# Altium PCB PCB_Right.pcbdoc
Units mil, origin at the board's own origin, x right, y up, seen from the top; angles counter-clockwise.
Board outline 7305 x 5435 mil, 2 copper layers (Top Layer, Bottom Layer), stack 62.206 mil thick; 24 components, 33 nets, 133 pads, 32 vias.
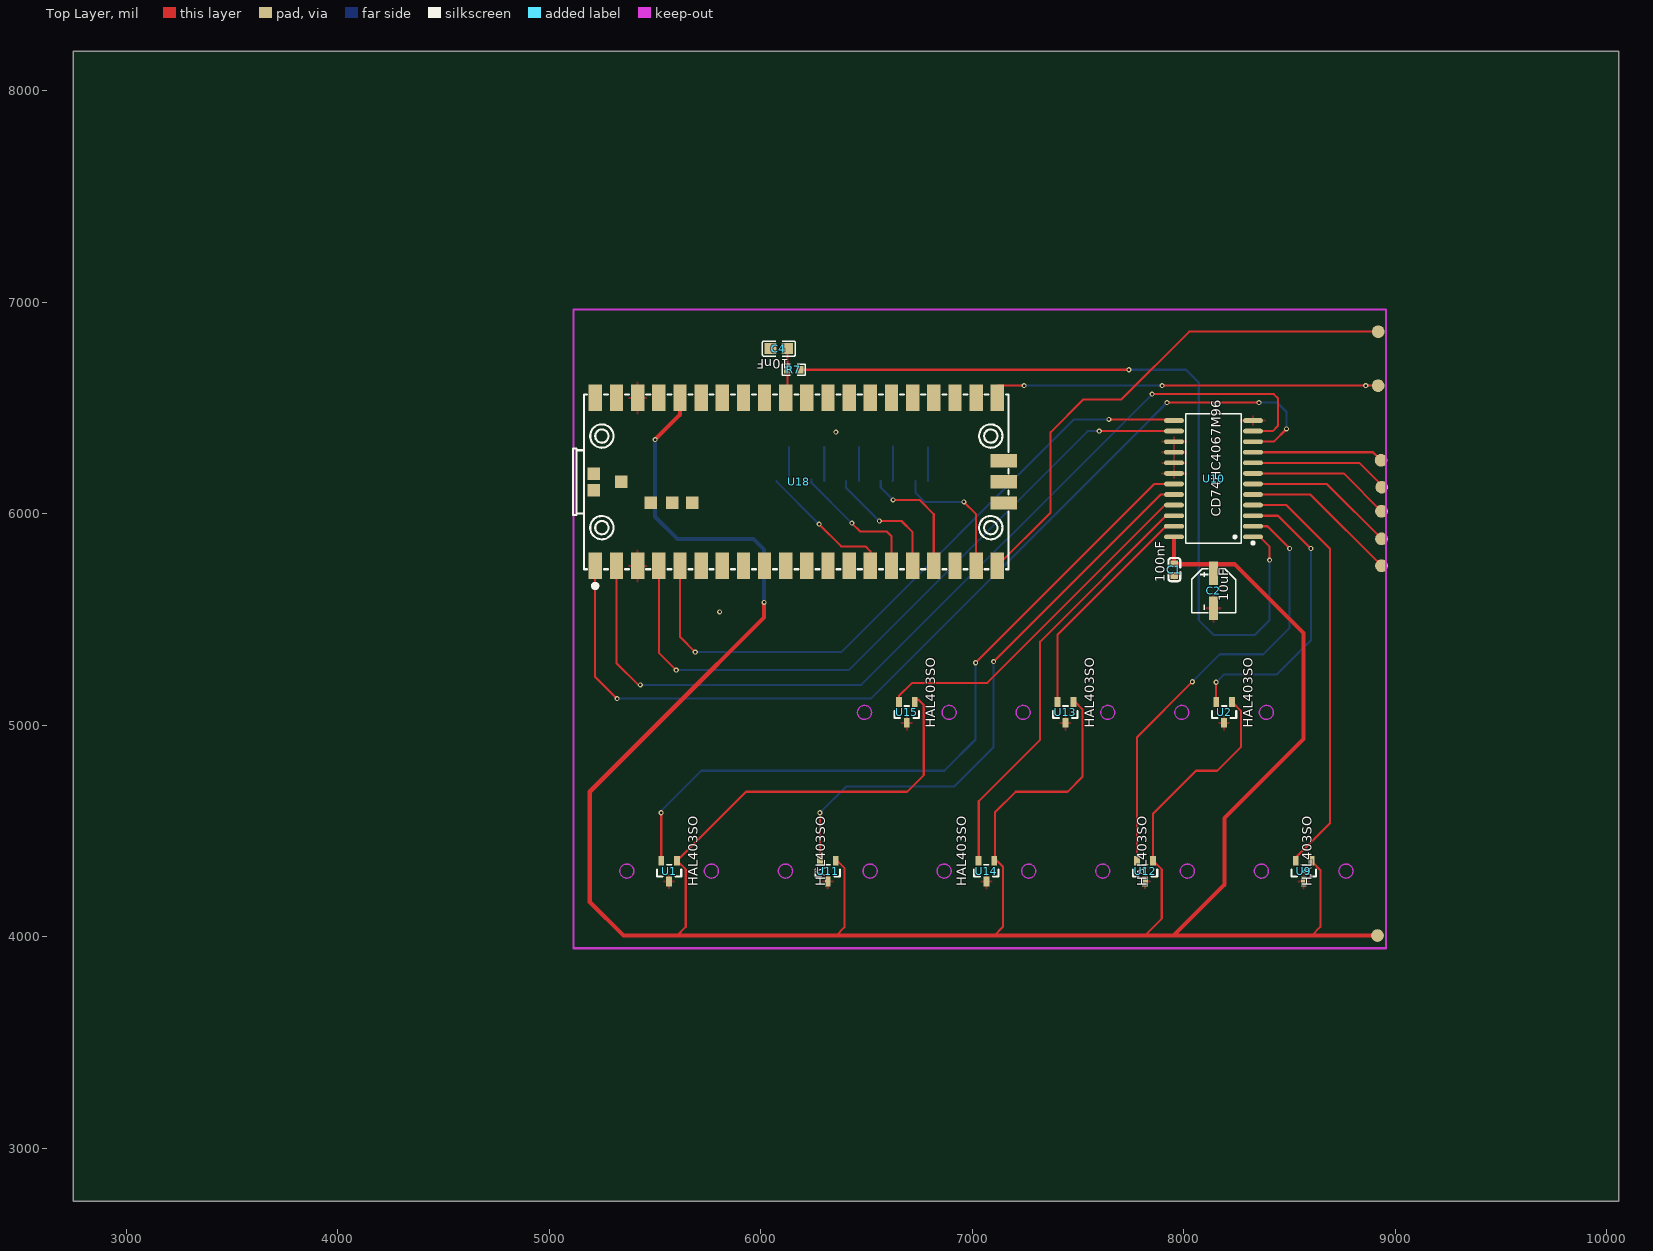
[diagram p0: Top Layer view]
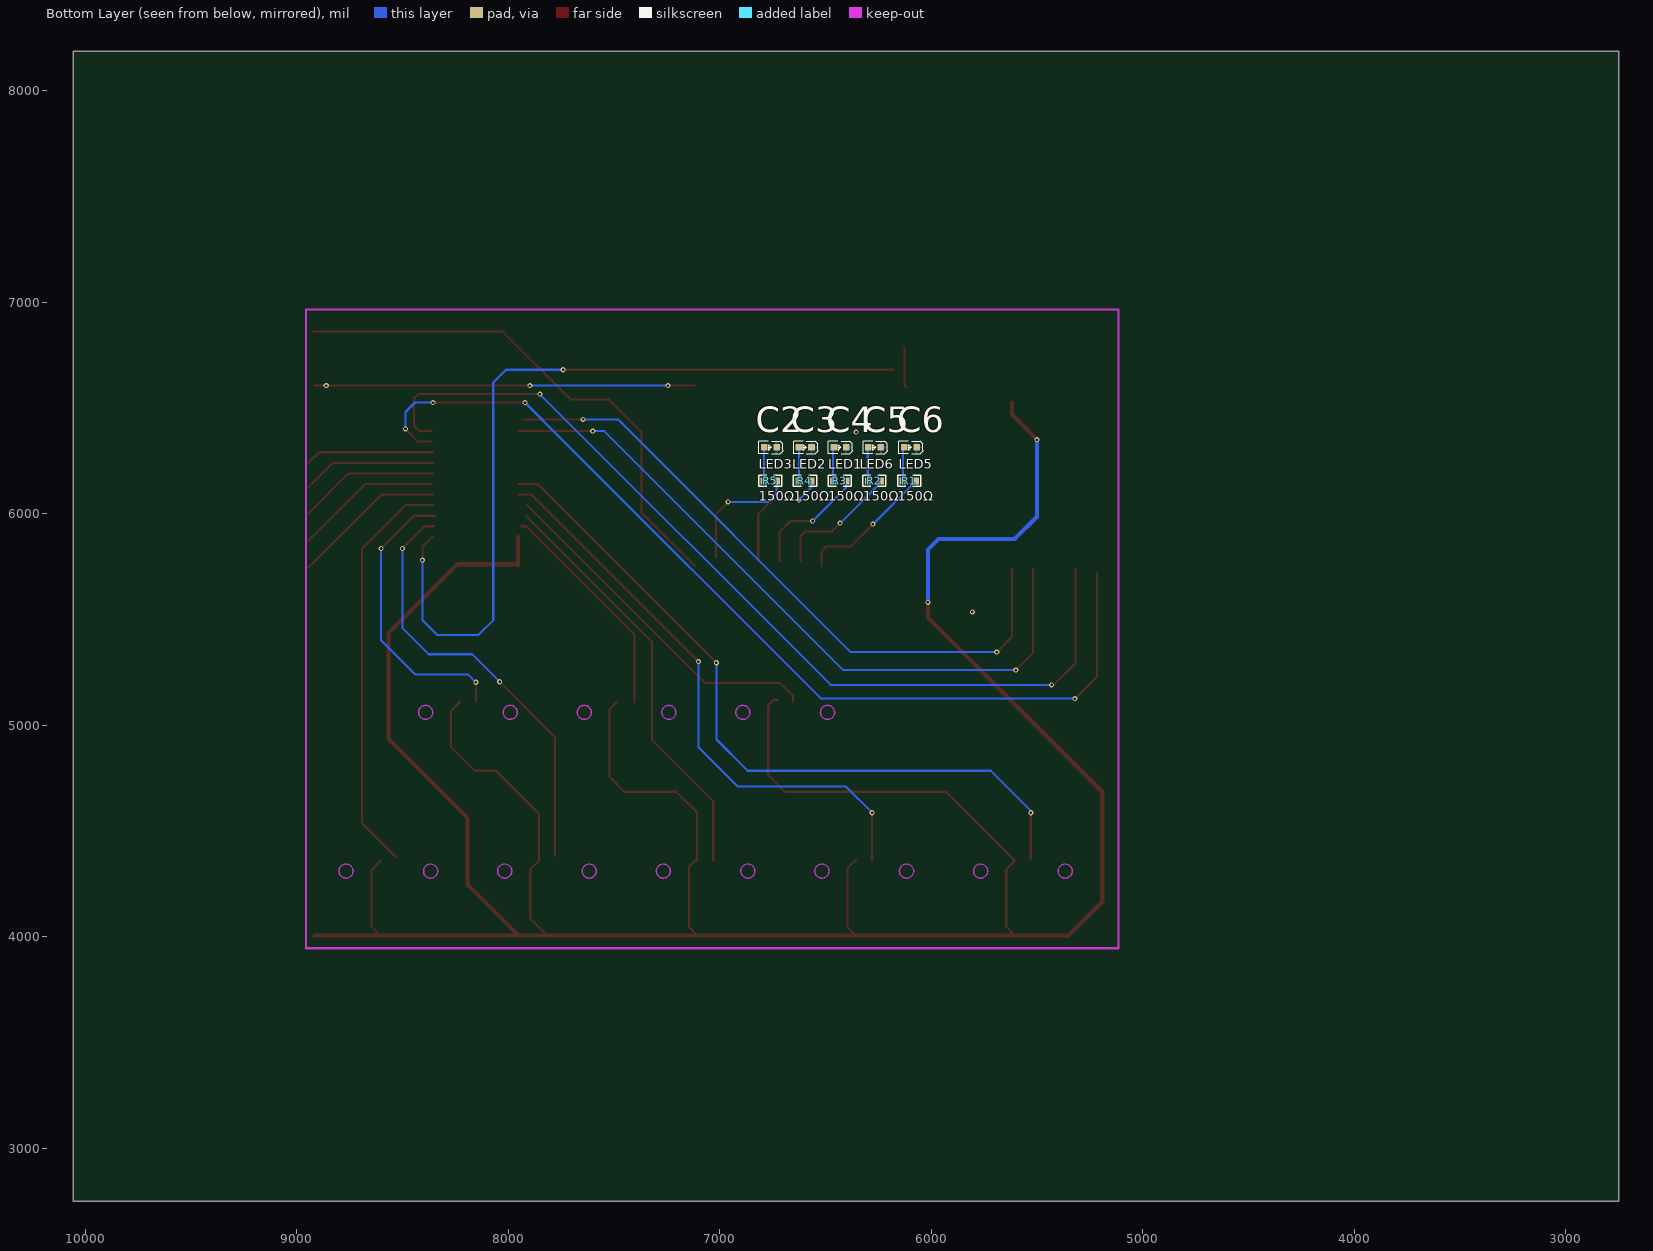
[diagram p1: Bottom Layer view, seen from below]

## Layer stack, top to bottom
Top Solder Mask Layer: solder mask 0.394, Dk 3.3
Top Layer: signal copper 1.379
Dielectric1: surface 59.449, FR4, Dk 4.5
Bottom Layer: signal copper 1.378
Bottom Solder Mask Layer: solder mask 0.394, Dk 3.3

## Board outline
10055,2750 2750,2750 2750,8185 10055,8185

## Design rules (kind name [scope] priority, off if disabled: settings)
BoardOutlineClearance copperThickness1oz [All] p0: genericclearance=10 ignorepadtopadclearanceinfootprint=FALSE except(0: Arc-SplitContinuation Track-SplitContinuation SMDPad-SplitContinuation THPad-SplitContinuation Via-SplitContinuation Fill-SplitContinuation Poly-SplitContinuation Region-SplitContinuation Text-SplitContinuation)
BoardOutlineClearance copperThickness2oz [All] p0: genericclearance=10 ignorepadtopadclearanceinfootprint=FALSE except(0: Arc-SplitContinuation Track-SplitContinuation SMDPad-SplitContinuation THPad-SplitContinuation Via-SplitContinuation Fill-SplitContinuation Poly-SplitContinuation Region-SplitContinuation Text-SplitContinuation)
BoardOutlineClearance otherClearance [All] p0: genericclearance=10 ignorepadtopadclearanceinfootprint=FALSE except(0: Arc-SplitContinuation Track-SplitContinuation SMDPad-SplitContinuation THPad-SplitContinuation Via-SplitContinuation Fill-SplitContinuation Poly-SplitContinuation Region-SplitContinuation Text-SplitContinuation)
Clearance copperThickness1oz [All] p1: gap=7 ignorepadtopadclearanceinfootprint=FALSE
Clearance copperThickness2oz [All] p1: gap=7 ignorepadtopadclearanceinfootprint=FALSE
Clearance otherClearance [All] p1: gap=7 ignorepadtopadclearanceinfootprint=FALSE
DiffPairsRouting differentialPair [All] p1: maxuncoupledlength=10 minlimit=6 maxlimit=Infinity mostfreqgap=6 toplayer_minwidth=5 toplayer_prefwidth=10 toplayer_maxwidth=100 bottomlayer_minwidth=5 bottomlayer_prefwidth=10 bottomlayer_maxwidth=100
PasteMaskExpansion pasteMaskExpansion [All] p1: expansion=0
PlaneConnect innerPlane [All] p1: planeconnectstyle=Relief reliefexpansion=20 reliefentries=4 reliefconductorwidth=10 reliefairgap=10
PolygonConnect copperRegion [All] p1: connectstyle=Relief reliefentries=4 reliefconductorwidth=10 polygonreliefangle="90 Angle" airgapwidth=10
RoutingVias viaSize [All] p1: viastyle="Through Hole" holewidth=12.0078 minholewidth=11.811 maxholewidth=248.0314 width=12.0078 minwidth=11.811 maxwidth=248.0314
SolderMaskExpansion solderMaskExpansion [All] p1: useseparateexpansions=TRUE expansion=2 expansionbottom=2
Width copperThickness1oz [All] p1: maxlimit=100 minlimit=5 preferedwidth=10
Width copperThickness2oz [All] p1: maxlimit=100 minlimit=8 preferedwidth=10

## Components (designator, comment, footprint, x,y, rotation, side; value= is the part's Value field where it differs from the comment)
C1 "100nF" C0603 7955,5735 r90 top
C2 "10uF" CAP-SMD_BD5.0-L5.3-W5.3-LS6.0-FD 8140,5635 r270 top
C4 "10nF" C0805 6085,6780 r0 top
LED1 "" LED0603-RD 6431.28,6313.7 r0 bottom
LED2 "" LED0603-RD 6595.41,6313.7 r0 bottom
LED3 "" LED0603-RD 6759.53,6313.7 r0 bottom
LED5 "" LED0603-RD 6098.04,6313.7 r0 bottom
LED6 "" LED0603-RD 6267.16,6313.7 r0 bottom
R1 "150Ω" R0603 6104.03,6154.71 r0 bottom
R2 "150Ω" R0603 6268.15,6154.71 r0 bottom
R3 "150Ω" R0603 6432.27,6154.71 r0 bottom
R4 "150Ω" R0603 6596.39,6154.71 r0 bottom
R5 "150Ω" R0603 6760.51,6154.71 r0 bottom
R7 "" R0603 6155,6680 r180 top
U1 "HAL403SO" SOT-23-3_L2.9-W1.3-P1.90-LS2.4-BR-CW 5566.26,4310 r90 top
U2 "HAL403SO" SOT-23-3_L2.9-W1.3-P1.90-LS2.4-BR-CW 8190,5060 r90 top
U9 "HAL403SO" SOT-23-3_L2.9-W1.3-P1.90-LS2.4-BR-CW 8566.26,4310 r90 top
U10 "CD74HC4067M96" SOIC-24_L15.4-W7.5-P1.27-LS10.3-BL 8140,6165 r90 top
U11 "HAL403SO" SOT-23-3_L2.9-W1.3-P1.90-LS2.4-BR-CW 6316.26,4310 r90 top
U12 "HAL403SO" SOT-23-3_L2.9-W1.3-P1.90-LS2.4-BR-CW 7816.26,4310 r90 top
U13 "HAL403SO" SOT-23-3_L2.9-W1.3-P1.90-LS2.4-BR-CW 7440,5060 r90 top
U14 "HAL403SO" SOT-23-3_L2.9-W1.3-P1.90-LS2.4-BR-CW 7066.26,4310 r90 top
U15 "HAL403SO" SOT-23-3_L2.9-W1.3-P1.90-LS2.4-BR-CW 6690,5060 r90 top
U18 "" COMM-SMD_L51.0-W21.0-P2.54_SC0916 6180,6150 r0 top

## Footprints (in the part's own frame and the unit in brackets; to place one, negate y for a bottom-side part, rotate by r counter-clockwise, add the part's x,y. Pads: shape width x height; smd on the part's side, far side on the other; paste and mask are expansions set on the pad)
C0603 [mm]
  rect 0.8x0.9 smd: 1(-0.7,0) 2(0.7,0)
  silkscreen extent -1.39,-0.71 1.39,0.71
C0805 [mm]
  rect 1.41x1.35 smd: 1(-1,0) 2(1,0)
  silkscreen extent -1.96,-0.9 1.96,0.9
CAP-SMD_BD5.0-L5.3-W5.3-LS6.0-FD [mm]
  rect 2.8x1.1 smd: 1(-2.1,0) 2(2.1,0)
  silkscreen extent -2.66,-2.62 2.66,2.65
COMM-SMD_L51.0-W21.0-P2.54_SC0916 [mm]
  rect 1.6x3.2 smd: 1(-24.445,-10.087) 2(-21.905,-10.087) 3(-19.365,-10.087) 4(-16.825,-10.087) 5(-14.285,-10.087) 6(-11.745,-10.087) 7(-9.205,-10.087) 8(-6.665,-10.087) 9(-4.125,-10.087) 10(-1.585,-10.087) 11(0.955,-10.087) 12(3.495,-10.087) 13(6.035,-10.087) 14(8.575,-10.087) 15(11.115,-10.087) 16(13.655,-10.087) 17(16.195,-10.087) 18(18.735,-10.087) 19(21.275,-10.087) 20(23.815,-10.087) 21(23.815,10.087) 22(21.275,10.087) 23(18.735,10.087) 24(16.195,10.087) 25(13.655,10.087) 26(11.115,10.087) 27(8.575,10.087) 28(6.035,10.087) 29(3.495,10.087) 30(0.955,10.087) 31(-1.585,10.087) 32(-4.125,10.087) 33(-6.665,10.087) 34(-9.205,10.087) 35(-11.745,10.087) 36(-14.285,10.087) 37(-16.825,10.087) 38(-19.365,10.087) 39(-21.905,10.087) 40(-24.445,10.087)
  rect 3.2x1.6 smd: 41(24.615,-2.54) 42(24.615,0) 43(24.615,2.54)
  rect 1.5x1.5 smd: TP1(-21.315,0) TP2(-24.615,1) TP3(-24.615,-1) TP4(-17.815,-2.5) TP5(-15.188,-2.5) TP6(-12.815,-2.5)
  silkscreen extent -27.11,-12.75 25.18,10.5
LED0603-RD [mm]
  rect 0.8x0.8 smd: 1(-0.749,0) 2(0.749,0)
  silkscreen extent -1.49,-0.75 1.39,0.76
R0603 [mil]
  rect 31.75x34.02 smd: 1(-29.66,0) 2(29.66,0)
  silkscreen extent -55,-26 55,26
SOIC-24_L15.4-W7.5-P1.27-LS10.3-BL [mil]
  oval 22.6x94.02 smd: 1(-275,-186.77) 2(-225,-186.77) 3(-175,-186.77) 4(-125,-186.77) 5(-75,-186.77) 6(-25,-186.77) 7(25,-186.77) 8(75,-186.77) 9(125,-186.77) 10(175,-186.77) 11(225,-186.77) 12(275,-186.77) 13(275,186.77) 14(225,186.77) 15(175,186.77) 16(125,186.77) 17(75,186.77) 18(25,186.77) 19(-25,186.77) 20(-75,186.77) 21(-125,186.77) 22(-175,186.77) 23(-225,186.77) 24(-275,186.77)
  silkscreen extent -310,-193 306,131
SOT-23-3_L2.9-W1.3-P1.90-LS2.4-BR-CW [mm]
  rect 1.15x0.7 smd: 1(1.25,-0.95) 2(-1.25,0) 3(1.25,0.95)
  silkscreen extent -0.65,-1.46 0.76,1.46

## Free pads (board coordinates)
  round 60 smd: 1(8932,6252) 2(8915.31,4005) 2(8918.25,6604.75) 2(8918.6,6860) 4(8935,6125) 5(8934.03,6010.97) 7(8934.15,5880.69) 9(8934.1,5753.42)

## Via types
v1: diameter 24.02, hole 12.01, Top Layer to Bottom Layer, 32 vias

## Nets (pads, with @x,y where several pads share a name; then routed paths per layer and width w, separated by ;. In a path a pad name is that pad's centre, name@x,y a point inside that pad or via, vN(x,y) a via of type N, cw(c..) or ccw(c..) an arc to the next point about the centre after c; other vN are vias at no path point)
3.3V: C1.2 C2.1 pad.2@8915.31,4005 U1.1 U2.1 U9.1 U10.24 U11.1 U12.1 U13.1 U14.1 U15.1 U18.36 | length 15978.5
  Top Layer w10: 5603.66,4005 5645,4046.34 5645,4317.86 U1.1 5929.46,4685 6691.26,4685 6770,4763.74 6770,5095 6745,5120 U15.1@6725,5120 ; U11.1 6360.8,4359.2 6395,4325 6395,4043.58 6356.42,4005 ; 7103.53,4005 7145,4046.47 7145,4330 7115,4360 U14.1@7105,4360 ; U14.1@7106.26,4365 7106.26,4586.66 7204.6,4685 7450,4685 7520,4755 7520,5075 U13.1@7485,5110 ; 7814.67,4005 7895,4085.33 7895,4317.86 U12.1 7853.66,4580.86 7957.8,4685 8057.21,4784.41 8157.23,4784.41 8270.77,4897.95 8270.77,5065.83 U2.1 ; U9.1 8603.66,4356.34 8645,4315 8645,4046.03 8603.97,4005
  Top Layer w19.68: v1(5500,6350) 5617.6,6467.6 U18.36@5617.6,6524.01 ; 5581.26,5075 6015,5508.74 v1(6015,5580) ; 7950.57,4005 8191.26,4245.69 8191.26,4560 8565,4933.74 8565,5435 8239.29,5760.71 7960.71,5760.71 7955,5755 7953.23,5756.77 U10.24
  Top Layer w19.7: v1(6015,5580) 6015,5508.74 5191.05,4684.79 5191.05,4163.95 5350,4005 pad.2@8915.31,4005
  Bottom Layer w19.68: v1(5500,6350) 5500,5985 5605,5880 5965,5880 6015,5830 v1(6015,5580)
$1N67: R7.1 U10.1 | length 3843.6
  Top Layer w10: R7.1@6180.59,6680 6274.2,6680 v1(7740,6680) ; U10.1@8358.5,5890 8405,5843.5 v1(8405,5780)
  Bottom Layer w10: v1(7740,6680) 8010,6680 8070,6620 8070,5496.5 8140.25,5426.25 8334.5,5426.25 8405,5496.75 v1(8405,5780)
$1N118: LED5.2 R1.2 | length 158.9
  Bottom Layer w10: R1.2 LED5.2@6133.69,6313.58
$1N119: R1.1 U18.14 | length 652.8
  Top Layer w10: v1(6275,5950) 6380,5845 6495,5845 6517.59,5822.41 U18.14
  Bottom Layer w10: R1.1 6074.37,6150.63 v1(6275,5950)
$1N120: LED6.2 R2.2 | length 158.8
  Bottom Layer w10: R2.2@6299.45,6154.71 LED6.2@6299.45,6313.49
$1N121: R2.1 U18.15 | length 615.3
  Top Layer w10: v1(6430,5955) 6470,5915 6595,5915 6617.6,5892.4 U18.15@6617.6,5775.98
  Bottom Layer w10: R2.1@6240,6160 6240,6148.99 6238.01,6146.99 v1(6430,5955)
$1N122: LED1.2 R3.2 | length 158.8
  Bottom Layer w10: R3.2@6463.57,6154.71 LED1.2@6463.57,6313.49
$1N123: R3.1 U18.16 | length 570.7
  Top Layer w10: v1(6560,5965) 6665,5965 6717.6,5912.4 U18.16@6717.6,5775.98
  Bottom Layer w10: R3.1 6402.61,6122.39 v1(6560,5965)
$1N124: LED2.2 R4.2 | length 162.4
  Bottom Layer w10: R4.2@6621.98,6154.71 6624.33,6157.05 LED2.2@6624.33,6316.12
$1N125: R4.1 U18.17 | length 555.9
  Top Layer w10: v1(6625,6065) 6750,6065 6817.6,5997.4 U18.17@6817.6,5775.98
  Bottom Layer w10: R4.1 6566.73,6123.27 v1(6625,6065)
$1N126: LED3.2 R5.2 | length 156.3
  Bottom Layer w10: R5.2 LED3.2@6790.17,6311.01
$1N127: R5.1 U18.19 | length 588.4
  Top Layer w10: v1(6960,6055) 7017.59,5997.41 U18.19@7017.59,5793.49
  Bottom Layer w10: R5.1 6730.85,6099.15 6775,6055 v1(6960,6055)
$1N130: pad.2@8918.6,6860 U18.20 | length 2482
  Top Layer w10: U18.20 7370,6005.27 7370,6385 7525,6540 7705,6540 8025,6860 pad.2@8918.6,6860
$1N131: pad.2@8918.25,6604.75 U18.21 | length 1799.8
  Top Layer w10: U18.21@7118.47,6604.75 v1(7245,6604.75) ; v1(7896.73,6604.75) v1(8859.75,6604.75) pad.2@8918.25,6604.75
  Bottom Layer w10: v1(7245,6604.75) v1(7896.73,6604.75)
A: U10.22 U14.3 | length 1997.9
  Top Layer w10: U14.3 7030,4360.34 7030,4640 7320,4930 7320,5100 7320,5394.94 U10.22@7915.06,5990
A#: U10.21 U15.3 | length 1659.8
  Top Layer w10: U15.3 6652.6,5137.6 6715,5200 7070.2,5200 7164.41,5294.21 U10.21@7910.2,6040
ADDRESS_A: U10.10 U18.1 | length 4658.7
  Top Layer w10: U18.1@5215,5720 5215,5230 v1(5320,5125) 5307.69,5137.31 ; v1(7920,6525) v1(8355,6525) ; U10.10@8360,6340 8425,6340 v1(8485,6400)
  Bottom Layer w10: v1@5329.44,5125 v1(5320,5125) 6520,5125 7747.24,6352.24 v1(7920,6525) ; v1(8355,6525) 8440,6525 8485,6480 v1(8485,6400)
ADDRESS_B: U10.11 U18.2 | length 4417.2
  Top Layer w10: U18.2@5317.6,5736.61 5317.6,5292.4 5420,5190 v1(5430,5190) ; v1(7850,6565) 7965,6565 8425,6565 8445,6545 8445,6415 8420,6390 U10.11@8360,6390
  Bottom Layer w10: v1(5430,5190) 5440,5190 6475,5190 v1(7850,6565)
ADDRESS_C: U10.14 U18.4 | length 3332
  Top Layer w10: U18.4@5517.59,5736.61 5517.59,5342.41 v1(5600,5260) ; v1(7599.81,6390) 7633.54,6390 7750,6390 U10.14
  Bottom Layer w10: v1(5600,5260) 5655,5260 6415,5260 7545,6390 v1(7599.81,6390)
ADDRESS_D: U10.13 U18.5 | length 3112.2
  Top Layer w10: U18.5@5617.6,5736.61 5617.6,5417.4 v1(5690,5345) ; v1(7645.35,6445) 7675,6445 7765,6445 U10.13@7925,6445
  Bottom Layer w10: v1(5690,5345) 6380,5345 7480,6445 v1(7645.35,6445)
B: U10.20 U11.3 | length 2761.2
  Top Layer w10: U11.3 v1(6278.86,4585.59) ; v1(7100,5300) 7890,6090 U10.20
  Bottom Layer w10: v1(6278.86,4585.59) 6403.27,4710 6795,4710 6915,4710 7100,4895 v1(7100,5300)
C: pad.1 U10.9 | length 609.7
  Top Layer w10: U10.9@8355,6290 8710.19,6290 8894,6290 pad.1@8944.02,6239.98
C#: pad.4 U10.8 | length 636.7
  Top Layer w10: U10.8@8355,6240 8685.88,6240 8828.86,6240 pad.4@8944.02,6124.85
C+1: U1.3 U10.19 | length 3494.7
  Top Layer w10: U1.3@5528.86,4367.43 v1(5528.86,4585.59) ; v1(7015,5295) 7860,6140 U10.19
  Bottom Layer w10: v1@5528.86,4595.72 5717.55,4784.41 6867.18,4784.41 7015,4932.23 v1(7015,5295)
COMMON: C4.2 R7.2 U18.31 | length 184.2
  Top Layer w10: U18.31@6117.6,6599.41 6125.34,6607.15 6125.34,6779.03 C4.2
D: pad.5 U10.7 | length 666
  Top Layer w10: U10.7@8355,6190 8654.61,6190 8755,6190 pad.5@8943.1,6001.9
D#: pad.7 U10.6 | length 695.5
  Top Layer w10: U10.6@8360,6140 8626.53,6140 8674.84,6140 pad.7@8944.02,5870.82
E: pad.9 U10.5 | length 732.5
  Top Layer w10: U10.5@8355,6090 8597.52,6090 pad.9@8944.02,5743.5
F: U9.3 U10.4 | length 1946.2
  Top Layer w10: U10.4@8355,6040 8485,6040 8690,5835 8690,4535 U9.3@8530,4375
F#: U2.3 U10.3 | length 1379
  Top Layer w10: U2.3 v1(8152.6,5202.6) ; U10.3@8342.76,5990 8445,5990 v1(8600,5835)
  Bottom Layer w10: v1(8152.6,5202.6) 8190,5240 8440,5240 8600,5400 v1(8600,5835)
G: U10.2 U12.3 | length 2065.1
  Top Layer w10: 7778.86,4382.17 7778.86,4943.86 v1(8040,5205) ; U10.2@8350,5940 8395,5940 v1(8500,5835)
  Bottom Layer w10: v1(8040,5205) 8170,5335 8375,5335 8500,5460 v1(8500,5835)
G#: U10.23 U13.3 | length 1065.3
  Top Layer w10: U13.3 7402.6,5427.6 7915,5940 U10.23@7937.24,5940
GND: C1.1 C2.2 LED1.1 LED2.1 LED3.1 LED5.1 LED6.1 U1.2 U2.2 U9.2 U10.12 U10.15 U10.16 U10.17 U10.18 U11.2 U12.2 U13.2 U14.2 U15.2 U18.3 U18.38
  other v1: 5805,5535 6355,6385
pads on no net: C4.1 U18.6 U18.7 U18.8 U18.9 U18.10 U18.11 U18.12 U18.13 U18.18 U18.22 U18.23 U18.24 U18.25 U18.26 U18.27 U18.28 U18.29 U18.30 U18.32 U18.33 U18.34 U18.35 U18.37 U18.39 U18.40 U18.41 U18.42 U18.43 U18.TP1 U18.TP2 U18.TP3 U18.TP4 U18.TP5 U18.TP6

## Polygon pours and split planes (outlines as drawn)
GND on Bottom Layer (solid, remove dead copper, pour order 2): 3000,7935 9805,7935 9805,3000 3000,3000
GND on Top Layer (solid, remove dead copper, pour order 0): 4900,6965 9255,6965 9255,3635 4900,3635

## Keep-outs
Board Outline Layer:
  region: 5399.72,4310 cw(c5366.26,4310) 5332.8,4310 cw(c5366.26,4310)
  circle w0.1: c5366.26,4310 r33.46
  region: 5399.72,4310 cw(c5366.26,4310) 5332.8,4310 cw(c5366.26,4310)
  region: 5799.72,4310 cw(c5766.26,4310) 5732.8,4310 cw(c5766.26,4310)
  circle w0.1: c5766.26,4310 r33.46
  region: 5799.72,4310 cw(c5766.26,4310) 5732.8,4310 cw(c5766.26,4310)
  region: 6149.72,4310 cw(c6116.26,4310) 6082.8,4310 cw(c6116.26,4310)
  circle w0.1: c6116.26,4310 r33.46
  region: 6149.72,4310 cw(c6116.26,4310) 6082.8,4310 cw(c6116.26,4310)
  region: 6523.46,5060 cw(c6490,5060) 6456.54,5060 cw(c6490,5060)
  circle w0.1: c6490,5060 r33.46
  region: 6523.46,5060 cw(c6490,5060) 6456.54,5060 cw(c6490,5060)
  region: 6549.72,4310 cw(c6516.26,4310) 6482.8,4310 cw(c6516.26,4310)
  circle w0.1: c6516.26,4310 r33.46
  region: 6549.72,4310 cw(c6516.26,4310) 6482.8,4310 cw(c6516.26,4310)
  region: 6899.72,4310 cw(c6866.26,4310) 6832.8,4310 cw(c6866.26,4310)
  circle w0.1: c6866.26,4310 r33.46
  region: 6899.72,4310 cw(c6866.26,4310) 6832.8,4310 cw(c6866.26,4310)
  region: 6923.46,5060 cw(c6890,5060) 6856.54,5060 cw(c6890,5060)
  circle w0.1: c6890,5060 r33.46
  region: 6923.46,5060 cw(c6890,5060) 6856.54,5060 cw(c6890,5060)
  region: 7273.46,5060 cw(c7240,5060) 7206.54,5060 cw(c7240,5060)
  circle w0.1: c7240,5060 r33.46
  region: 7273.46,5060 cw(c7240,5060) 7206.54,5060 cw(c7240,5060)
  region: 7299.72,4310 cw(c7266.26,4310) 7232.8,4310 cw(c7266.26,4310)
  circle w0.1: c7266.26,4310 r33.46
  region: 7299.72,4310 cw(c7266.26,4310) 7232.8,4310 cw(c7266.26,4310)
  region: 7649.72,4310 cw(c7616.26,4310) 7582.8,4310 cw(c7616.26,4310)
  circle w0.1: c7616.26,4310 r33.46
  region: 7649.72,4310 cw(c7616.26,4310) 7582.8,4310 cw(c7616.26,4310)
  region: 7673.46,5060 cw(c7640,5060) 7606.54,5060 cw(c7640,5060)
  circle w0.1: c7640,5060 r33.46
  region: 7673.46,5060 cw(c7640,5060) 7606.54,5060 cw(c7640,5060)
  region: 8023.46,5060 cw(c7990,5060) 7956.54,5060 cw(c7990,5060)
  circle w0.1: c7990,5060 r33.46
  region: 8023.46,5060 cw(c7990,5060) 7956.54,5060 cw(c7990,5060)
  region: 8049.72,4310 cw(c8016.26,4310) 7982.8,4310 cw(c8016.26,4310)
  circle w0.1: c8016.26,4310 r33.46
  region: 8049.72,4310 cw(c8016.26,4310) 7982.8,4310 cw(c8016.26,4310)
  region: 8399.72,4310 cw(c8366.26,4310) 8332.8,4310 cw(c8366.26,4310)
  circle w0.1: c8366.26,4310 r33.46
  region: 8399.72,4310 cw(c8366.26,4310) 8332.8,4310 cw(c8366.26,4310)
  region: 8423.46,5060 cw(c8390,5060) 8356.54,5060 cw(c8390,5060)
  circle w0.1: c8390,5060 r33.46
  region: 8423.46,5060 cw(c8390,5060) 8356.54,5060 cw(c8390,5060)
  region: 8799.72,4310 cw(c8766.26,4310) 8732.8,4310 cw(c8766.26,4310)
  circle w0.1: c8766.26,4310 r33.46
  region: 8799.72,4310 cw(c8766.26,4310) 8732.8,4310 cw(c8766.26,4310)
  lines w10: 5115,3945 8955,3945 8955,6965 5115,6965 5115,3945

## Silkscreen, mask and mechanical layers (free items; w line width, h text height)
Bottom Silkscreen Layer:
  text "C6" at 6159.73,6385 h120
  text "C5" at 6326.42,6385 h120
  text "C4" at 6496.62,6385 h120
  text "C3" at 6663.31,6385 h120
  text "C2" at 6830,6385 h120
Mechanical Layer:
  circle w0.1: c5366.26,4310 r33.46
  circle w0.1: c5766.26,4310 r33.46
  circle w0.1: c6116.26,4310 r33.46
  circle w0.1: c6490,5060 r33.46
  circle w0.1: c6516.26,4310 r33.46
  circle w0.1: c6866.26,4310 r33.46
  circle w0.1: c6890,5060 r33.46
  circle w0.1: c7240,5060 r33.46
  circle w0.1: c7266.26,4310 r33.46
  circle w0.1: c7616.26,4310 r33.46
  circle w0.1: c7640,5060 r33.46
  circle w0.1: c7990,5060 r33.46
  circle w0.1: c8016.26,4310 r33.46
  circle w0.1: c8366.26,4310 r33.46
  circle w0.1: c8390,5060 r33.46
  circle w0.1: c8766.26,4310 r33.46